# EAGLE board 20x20element (EAGLE 7.7.0)
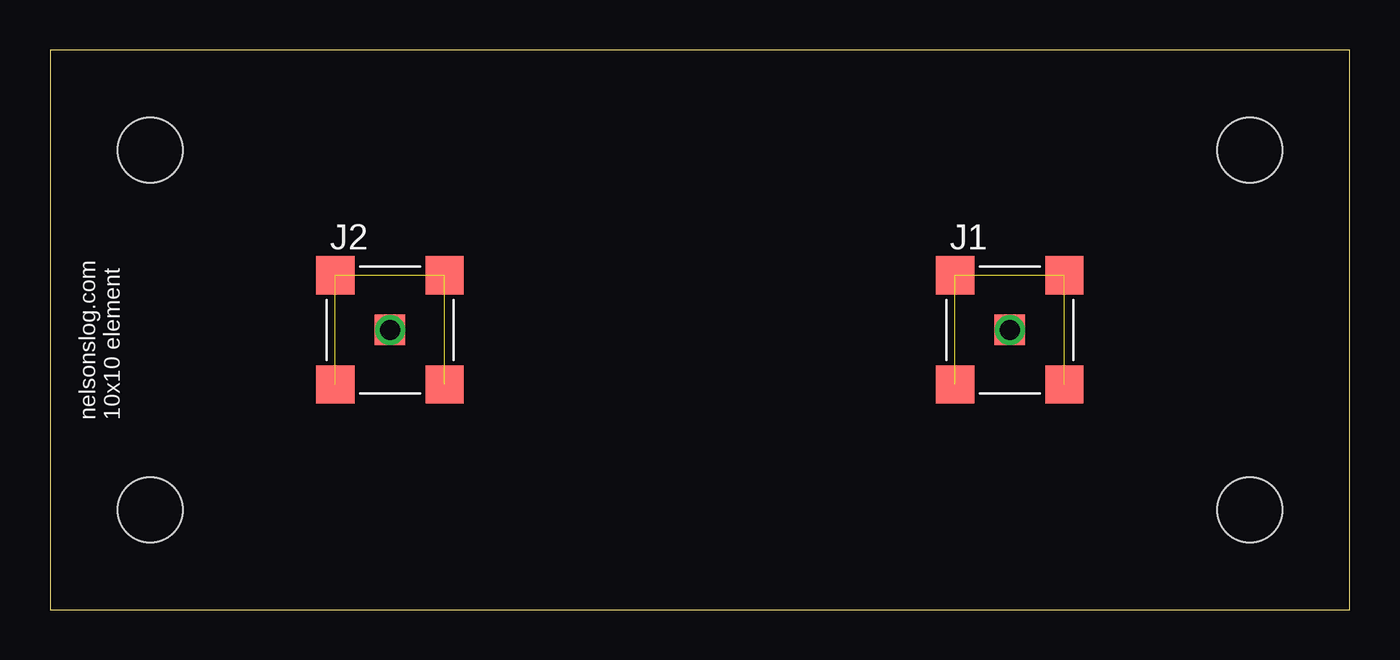
[diagram p0: board, top side]
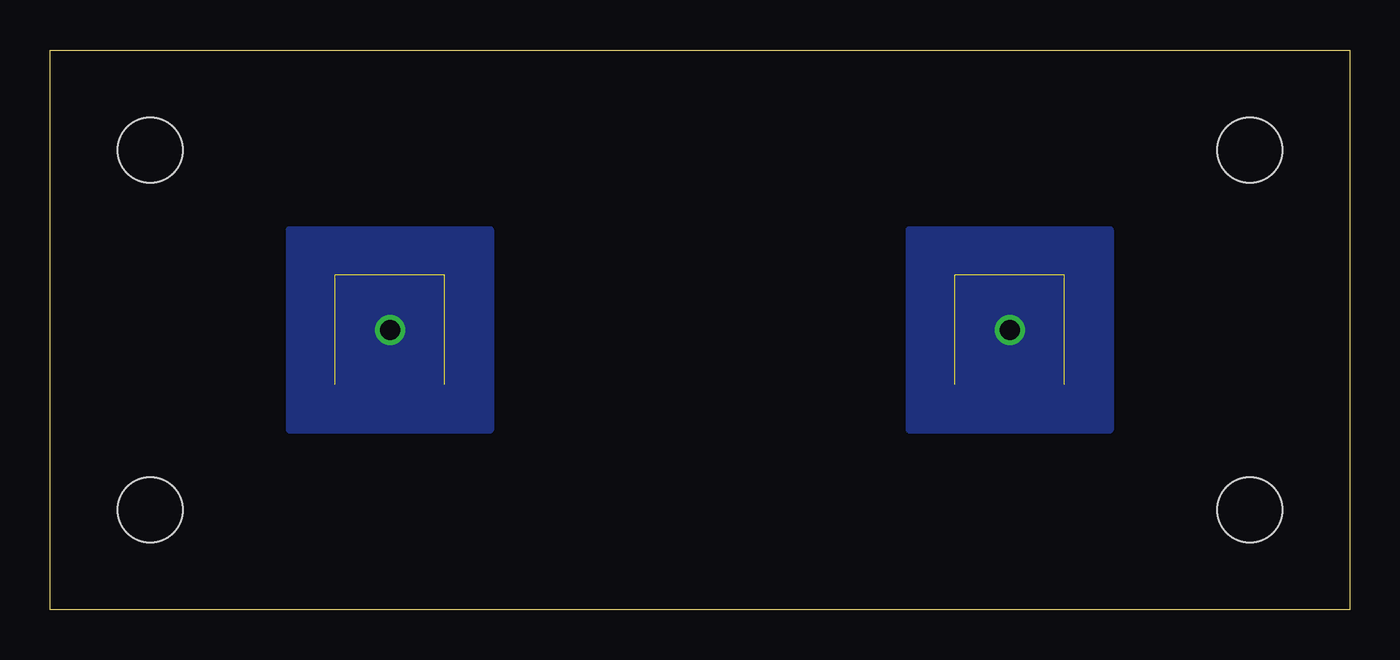
[diagram p1: board, bottom side, seen from below]

Size 65 x 28 mm. Coordinates in mm from the lower left corner, seen from the top.
Outline: 0,0 65,0 65,28 0,28 0,0
Copper layers (1*16): Top 0.0356mm / dielectric 1.5011mm / Bottom 0.0356mm
Design rules "oshpark-2layer": minimum track width 6mil, minimum drill 13mil, track to track 6mil, track to pad 6mil, pad to pad 6mil, via to via 6mil, smd to smd 6mil, copper to edge 15mil, drill to drill 6mil, minimum pad ring 7mil, minimum via ring 7mil, stop-mask expansion 2.5mil, vias tented up to drill 0mil, thermal gap 10mil
Holes 3.25 mm at 5,23 5,5 60,23 60,5

## Footprints (pad centres in the part's own frame; a part is rotated, then mirrored left to right if it is on the bottom)
0732511352 = smd 1.91 x 1.91: SHLD1 -2.73,2.73; SHLD2 2.73,2.73; SHLD3 2.73,-2.73; SHLD4 -2.73,-2.73 | smd 1.52 x 1.52: SIG 0,0

## Placement (x,y rotation side)
J1  SMA-SMT-  [0732511352]  48,14 0 top
J2  SMA-SMT-  [0732511352]  17,14 0 top

## Library data of the parts
J1 J2 = myLib; MFG: molex; MPN: 0732511352

## Nets
SHLDA: J1.SHLD1 J1.SHLD2 J1.SHLD3 J1.SHLD4
SHLDB: J2.SHLD1 J2.SHLD2 J2.SHLD3 J2.SHLD4
SIGA: J1.SIG
SIGB: J2.SIG

## Tracks (layer width: path | path; a pad name or v marks a point on that pad's centre or on a via)
SHLDA  (3 unrouted)
SHLDB  (3 unrouted)
SIGA  (via drill 1)
  other vias: 48,14
  pour Bottom: 43,9 53,9 53,19 43,19
SIGB  (via drill 1)
  other vias: 17,14
  pour Bottom: 12,9 22,9 22,19 12,19

## Text on the board
tPlace: nelsonslog.com / 10x10 element